# Altium PCB Microdrive_Electrode_ 4_Layers.PcbDoc
Units mm, origin at the board's own origin, x right, y up, seen from the top; angles counter-clockwise.
Board outline 29.7 x 17.4 mm, 4 copper layers (Top Layer, Mid-Layer 1, Mid-Layer 2, Bottom Layer), stack 0.492 mm thick; 50 components, 37 nets, 120 pads, 66 vias.
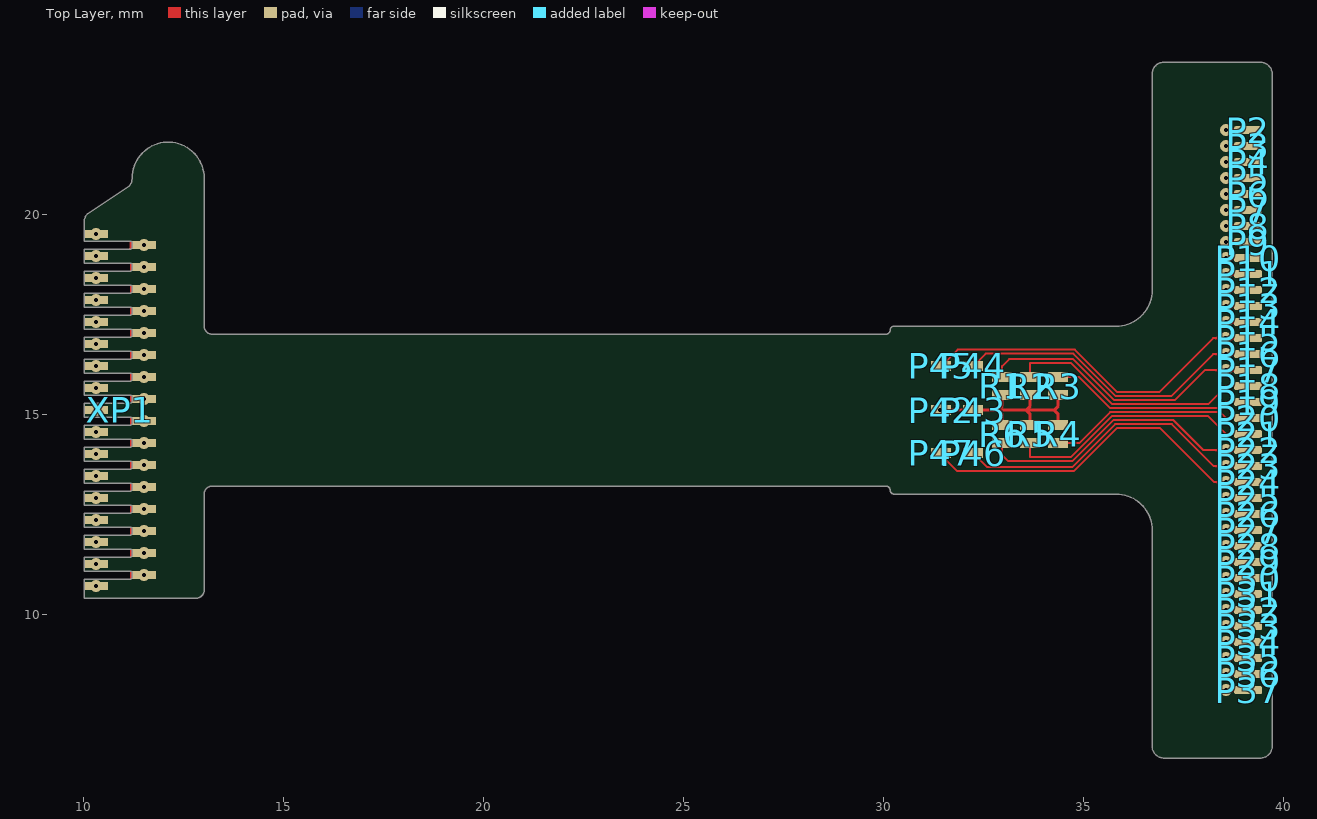
[diagram p0: Top Layer view]
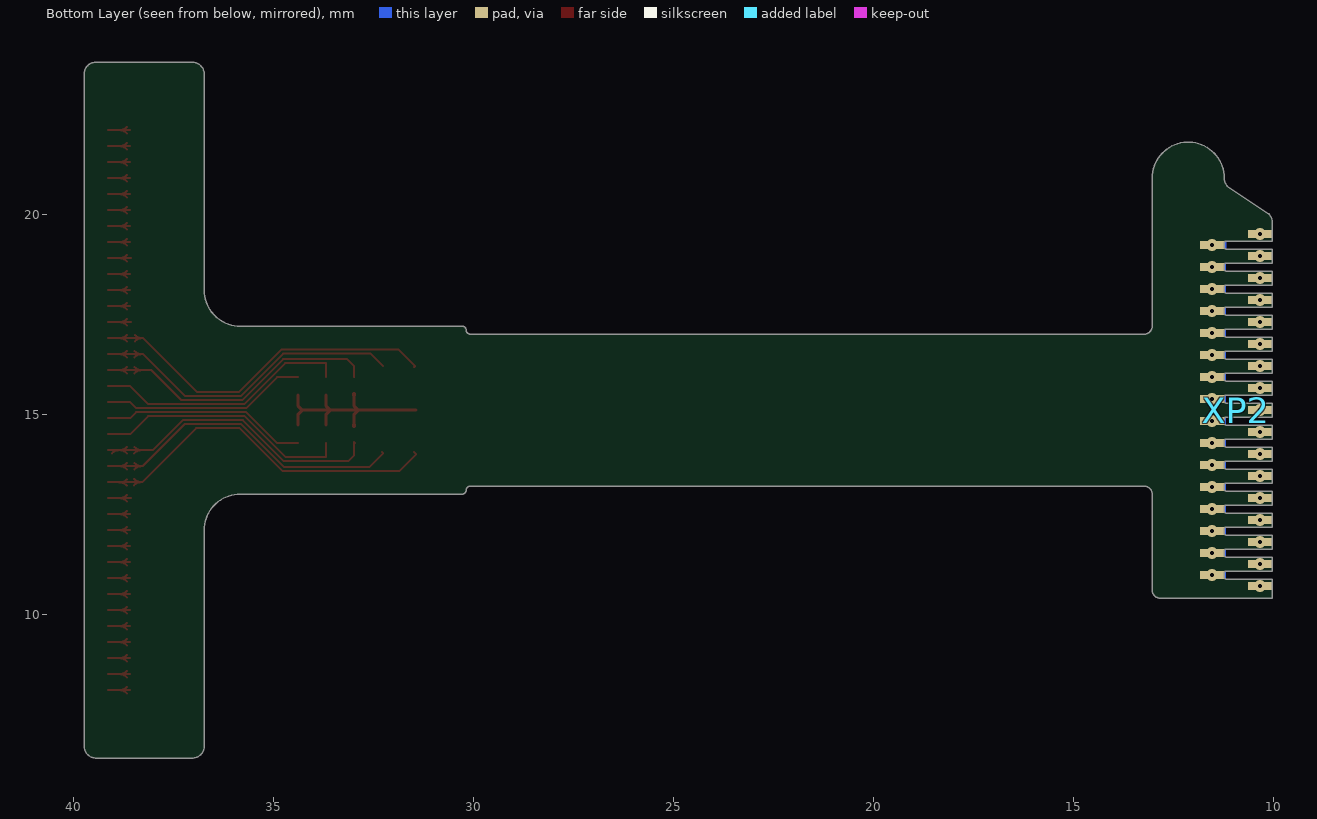
[diagram p1: Bottom Layer view, seen from below]
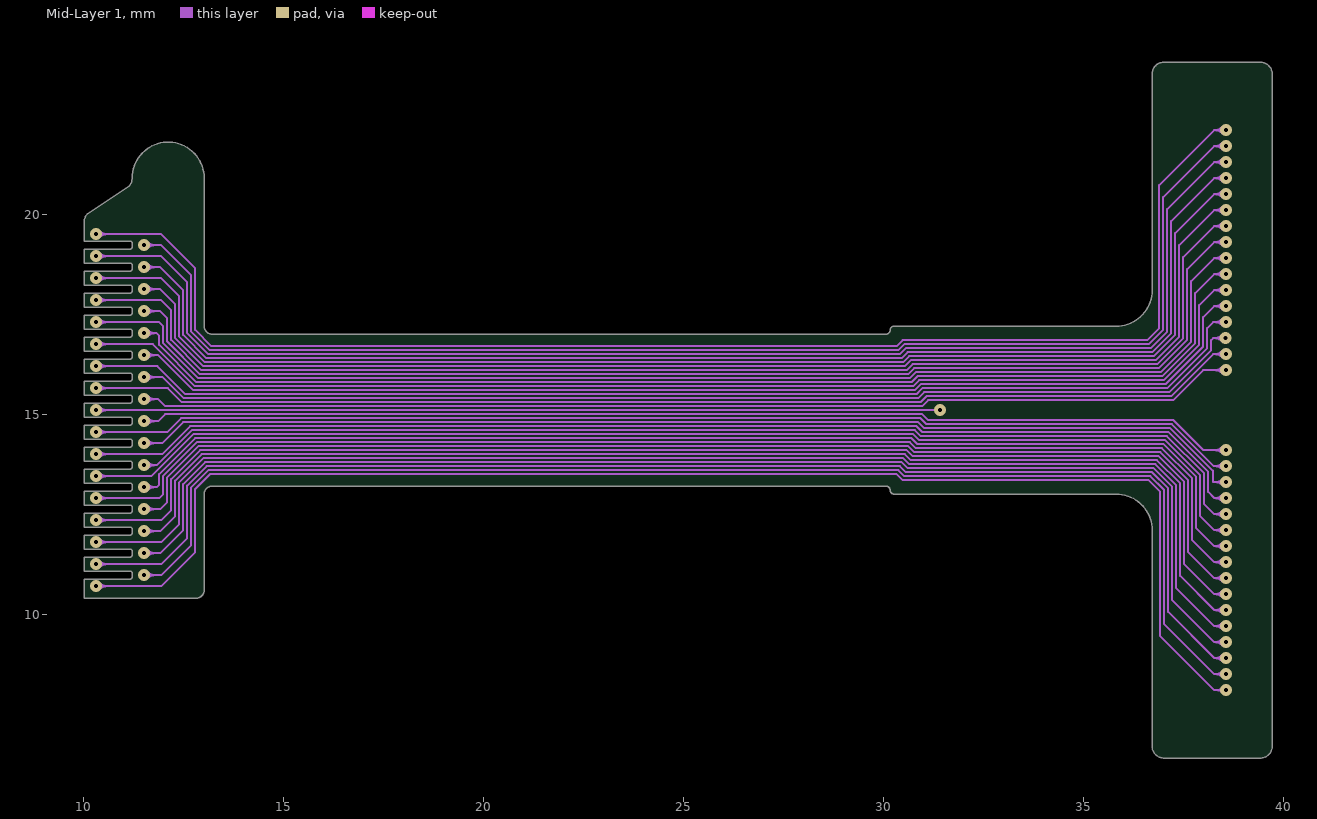
[diagram p2: Mid-Layer 1]

## Layer stack, top to bottom
Top Solder: solder mask 0.0102, Solder Resist, Dk 3.5
Top Layer: signal copper 0.0356
Dielectric1: core 0.1, FR-4, Dk 4.8
Mid-Layer 1: signal copper 0.0356
Dielectric2: prepreg 0.15, FR-4, Dk 4.8
Mid-Layer 2: signal copper 0.0356
Dielectric3: core 0.1, FR-4, Dk 4.8
Bottom Layer: signal copper 0.0356
Bottom Solder: solder mask 0.0102, Solder Resist, Dk 3.5

## Board outline
10.025,11.625 10.025,11.975 11.175,11.975 ccw(c11.175,12.025) 11.225,12.025 11.225,12.125 ccw(c11.175,12.125) 11.175,12.175 10.025,12.175 10.025,12.525 11.175,12.525 ccw(c11.175,12.575) 11.225,12.575 11.225,12.675 ccw(c11.175,12.675) 11.175,12.725 10.025,12.725 10.025,13.075 11.175,13.075 ccw(c11.175,13.125) 11.225,13.125 11.225,13.225 ccw(c11.175,13.225) 11.175,13.275 10.025,13.275 10.025,13.625 11.175,13.625 ccw(c11.175,13.675) 11.225,13.675 11.225,13.775 ccw(c11.175,13.775) 11.175,13.825 10.025,13.825 10.025,14.175 11.175,14.175 ccw(c11.175,14.225) 11.225,14.225 11.225,14.325 ccw(c11.175,14.325) 11.175,14.375 10.025,14.375 10.025,14.725 11.175,14.725 ccw(c11.175,14.775) 11.225,14.775 11.225,14.875 ccw(c11.175,14.875) 11.175,14.925 10.025,14.925 10.025,15.275 11.175,15.275 ccw(c11.175,15.325) 11.225,15.325 11.225,15.425 ccw(c11.175,15.425) 11.175,15.475 10.025,15.475 10.025,15.825 11.175,15.825 ccw(c11.175,15.875) 11.225,15.875 11.225,15.975 ccw(c11.175,15.975) 11.175,16.025 10.025,16.025 10.025,16.375 11.175,16.375 ccw(c11.175,16.425) 11.225,16.425 11.225,16.525 ccw(c11.175,16.525) 11.175,16.575 10.025,16.575 10.025,16.925 11.175,16.925 ccw(c11.175,16.975) 11.225,16.975 11.225,17.075 ccw(c11.175,17.075) 11.175,17.125 10.025,17.125 10.025,17.475 11.175,17.475 ccw(c11.175,17.525) 11.225,17.525 11.225,17.625 ccw(c11.175,17.625) 11.175,17.675 10.025,17.675 10.025,18.025 11.175,18.025 ccw(c11.175,18.075) 11.225,18.075 11.225,18.175 ccw(c11.175,18.175) 11.175,18.225 10.025,18.225 10.025,18.575 11.175,18.575 ccw(c11.175,18.625) 11.225,18.625 11.225,18.725 ccw(c11.175,18.725) 11.175,18.775 10.025,18.775 10.025,19.125 11.175,19.125 ccw(c11.175,19.175) 11.225,19.175 11.225,19.275 ccw(c11.175,19.275) 11.175,19.325 10.025,19.325 10.025,19.8 cw(c10.325,19.8) 10.113,20.012 10.1,20 11.15,20.7 11.149,20.701 ccw(c10.925,20.9) 11.225,20.9 cw(c12.125,20.9) 13.025,20.9 13.025,17.2 ccw(c13.225,17.2) 13.225,17 30.075,17 ccw(c30.075,17.1) 30.175,17.1 cw(c30.275,17.1) 30.275,17.2 35.825,17.2 ccw(c35.825,18.1) 36.725,18.1 36.725,18.101 36.725,23.5 cw(c37.026,23.499) 37.026,23.8 39.425,23.8 cw(c39.426,23.499) 39.726,23.5 39.725,23.5 39.725,6.7 39.726,6.7 cw(c39.426,6.701) 39.425,6.4 37.025,6.4 cw(c37.024,6.701) 36.724,6.7 36.725,6.7 36.725,12.1 ccw(c35.825,12.1) 35.825,13 30.275,13 cw(c30.275,13.1) 30.175,13.1 ccw(c30.075,13.1) 30.075,13.2 13.225,13.2 ccw(c13.225,13) 13.025,13 13.025,10.6 cw(c12.825,10.6) 12.825,10.4 10.025,10.4 10.025,10.875 11.175,10.875 ccw(c11.175,10.925) 11.225,10.925 11.225,11.025 ccw(c11.175,11.025) 11.175,11.075 10.025,11.075 10.025,11.425 11.175,11.425 ccw(c11.175,11.475) 11.225,11.475 11.225,11.575 ccw(c11.175,11.575) 11.175,11.625

## Design rules (kind name [scope] priority, off if disabled: settings)
Clearance Clearance_1 [InNamedPolygon('GND-m1') Or  InNamedPolygon('GND-t') Or  InNamedPolygon('VDD')Or InNamedPolygon('GND-B') vs IsPad Or IsRegion] p1: gap=0.15 ignorepadtopadclearanceinfootprint=FALSE except(0: Arc-Hole Track-Hole SMDPad-Hole THPad-Hole Via-Hole Fill-Hole Poly-Hole Region-Hole Text-Hole)
Clearance Clearance_2 [InPolygon] p2: gap=0.1 ignorepadtopadclearanceinfootprint=FALSE except(0: Arc-Hole Track-Hole SMDPad-Hole THPad-Hole Via-Hole Fill-Hole Poly-Hole Region-Hole Text-Hole)
Clearance [All] p3: gap=0.05 ignorepadtopadclearanceinfootprint=FALSE except(0: Arc-Hole Track-Hole SMDPad-Hole THPad-Hole Via-Hole Fill-Hole Poly-Hole Region-Hole Text-Hole)
HoleToHoleClearance [All] p1: gap=0.25 allowstackedmicrovias=TRUE
MinimumSolderMaskSliver [All] p1 off: minsoldermaskwidth=0.1
PolygonConnect PolygonConnect_2 [All vs InPadClass('d-c')] p1: connectstyle=Direct reliefconductorwidth=0.254 reliefentries=4 polygonreliefangle="90 Angle" airgapwidth=0.254
PolygonConnect [All vs IsVia] p2: connectstyle=Direct reliefconductorwidth=0.15 reliefentries=4 polygonreliefangle="90 Angle" airgapwidth=0.254
PolygonConnect PolygonConnect_1 [All] p3: connectstyle=Relief reliefconductorwidth=0.15 reliefentries=4 polygonreliefangle="90 Angle" airgapwidth=0.254
RoutingCorners [All] p1: cornerstyle=45-Degree minsetback=1 maxsetback=1
RoutingVias [All] p1: holewidth=0.1 width=0.35 viastyle="Through Hole" minholewidth=0.1 minwidth=0.3 maxholewidth=0.2 maxwidth=0.5
SilkToSilkClearance [All] p1 off: silktosilkclearance=0.254
SilkToSolderMaskClearance SilkscreenOverComponentPads [IsPad] p1 off: minsilkscreentomaskgap=0.254 clearancetoexposedcopper=TRUE
SolderMaskExpansion [All] p1: expansion=0.075
Width [All] p1: maxlimit=0.15 minlimit=0.05 preferedwidth=0.075
25 further rules are at their usual default settings.

## Components (designator, comment, footprint, x,y, rotation, side; value= is the part's Value field where it differs from the comment)
P2 "Pad" KP-07-02 39.125,22.1 r180 top
P3 "Pad" KP-07-02 39.125,21.7 r180 top
P4 "Pad" KP-07-02 39.125,21.3 r180 top
P5 "Pad" KP-07-02 39.125,20.9 r180 top
P6 "Pad" KP-07-02 39.125,20.5 r180 top
P7 "Pad" KP-07-02 39.125,20.1 r180 top
P8 "Pad" KP-07-02 39.125,19.7 r180 top
P9 "Pad" KP-07-02 39.125,19.3 r180 top
P10 "Pad" KP-07-02 39.125,18.9 r180 top
P11 "Pad" KP-07-02 39.125,18.5 r180 top
P12 "Pad" KP-07-02 39.125,18.1 r180 top
P13 "Pad" KP-07-02 39.125,17.7 r180 top
P14 "Pad" KP-07-02 39.125,17.3 r180 top
P15 "Pad" KP-07-02 39.125,16.9 r180 top
P16 "Pad" KP-07-02 39.125,16.5 r180 top
P17 "Pad" KP-07-02 39.125,16.1 r180 top
P18 "Pad" KP-07-02 39.125,15.7 r180 top
P19 "Pad" KP-07-02 39.125,15.3 r180 top
P20 "Pad" KP-07-02 39.125,14.9 r180 top
P21 "Pad" KP-07-02 39.125,14.5 r180 top
P22 "Pad" KP-07-02 39.125,14.1 r180 top
P23 "Pad" KP-07-02 39.125,13.7 r180 top
P24 "Pad" KP-07-02 39.125,13.3 r180 top
P25 "Pad" KP-07-02 39.125,12.9 r180 top
P26 "Pad" KP-07-02 39.125,12.5 r180 top
P27 "Pad" KP-07-02 39.125,12.1 r180 top
P28 "Pad" KP-07-02 39.125,11.7 r180 top
P29 "Pad" KP-07-02 39.125,11.3 r180 top
P30 "Pad" KP-07-02 39.125,10.9 r180 top
P31 "Pad" KP-07-02 39.125,10.5 r180 top
P32 "Pad" KP-07-02 39.125,10.1 r180 top
P33 "Pad" KP-07-02 39.125,9.7 r180 top
P34 "Pad" KP-07-02 39.125,9.3 r180 top
P35 "Pad" KP-07-02 39.125,8.9 r180 top
P36 "Pad" KP-07-02 39.125,8.5 r180 top
P37 "Pad" KP-07-02 39.125,8.1 r180 top
P42 "KP-05025" KP-05-025 31.45,15.1 r180 top
P43 "KP-05025" KP-05-025 32.25,15.1 r180 top
P44 "KP-05025" KP-05-025 32.25,16.2 r180 top
P45 "KP-05025" KP-05-025 31.45,16.2 r0 top
P46 "KP-05025" KP-05-025 32.25,14.025 r180 top
P47 "KP-05025" KP-05-025 31.45,14.025 r180 top
R1 "0" "RESC widecustom" 32.975,15.7 r90 top
R2 "0" "RESC widecustom" 33.675,15.7 r90 top
R3 "0" "RESC widecustom" 34.375,15.7 r90 top
R4 "0" "RESC widecustom" 34.375,14.5 r270 top
R5 "0" "RESC widecustom" 33.675,14.5 r270 top
R6 "0" "RESC widecustom" 32.975,14.5 r270 top
XP1 "Solder Inteface 33 pads" "Solder Inteface 33 pads ver 3"#1 10.925,15.1 r270 top
XP2 "Solder Inteface 33 pads" "Solder Inteface 33 pads ver 3"#2 10.925,15.1 r270 bottom (schematic designator XP1)

## Footprints (in the part's own frame and the unit in brackets; to place one, negate y for a bottom-side part, rotate by r counter-clockwise, add the part's x,y. Pads: shape width x height; smd on the part's side, far side on the other; paste and mask are expansions set on the pad)
KP-05-025 [mm]
  rect 0.5x0.25 smd mask+0.05: 1(0,0)
KP-07-02 [mm]
  rrect50% 0.7x0.2 smd mask+0.05: 1(0,0)
"RESC widecustom" [mm]
  rect 0.25x0.5 smd mask+0.05: 1(-0.225,0) 2(0.225,0)
  body extent -0.31,-0.17 0.32,0.17, height 0.26
"Solder Inteface 33 pads ver 3"#1 [mm] "Solder Inteface 33 pads pad 0.2 space 0.35"
  rect 0.2x0.6 smd mask+0.05: 1(-4.4,-0.6) 2(-4.125,0.6) 3(-3.85,-0.6) 4(-3.575,0.6) 5(-3.3,-0.6) 6(-3.025,0.6) 7(-2.75,-0.6) 8(-2.475,0.6) 9(-2.2,-0.6) 10(-1.925,0.6) 11(-1.65,-0.6) 12(-1.375,0.6) 13(-1.1,-0.6) 14(-0.825,0.6) 15(-0.55,-0.6) 16(-0.275,0.6) 17(0,-0.6) 18(0.275,0.6) 19(0.55,-0.6) 20(0.825,0.6) 21(1.1,-0.6) 22(1.375,0.6) 23(1.65,-0.6) 24(1.925,0.6) 25(2.2,-0.6) 26(2.475,0.6) 27(2.75,-0.6) 28(3.025,0.6) 29(3.3,-0.6) 30(3.575,0.6) 31(3.85,-0.6) 32(4.125,0.6) 33(4.4,-0.6)
"Solder Inteface 33 pads ver 3"#2 [mm] "Solder Inteface 33 pads pad 0.2 space 0.35"
  rect 0.2x0.6 smd mask+0.05: 1(-4.4,0.6) 2(-4.125,-0.6) 3(-3.85,0.6) 4(-3.575,-0.6) 5(-3.3,0.6) 6(-3.025,-0.6) 7(-2.75,0.6) 8(-2.475,-0.6) 9(-2.2,0.6) 10(-1.925,-0.6) 11(-1.65,0.6) 12(-1.375,-0.6) 13(-1.1,0.6) 14(-0.825,-0.6) 15(-0.55,0.6) 16(-0.275,-0.6) 17(0,0.6) 18(0.275,-0.6) 19(0.55,0.6) 20(0.825,-0.6) 21(1.1,0.6) 22(1.375,-0.6) 23(1.65,0.6) 24(1.925,-0.6) 25(2.2,0.6) 26(2.475,-0.6) 27(2.75,0.6) 28(3.025,-0.6) 29(3.3,0.6) 30(3.575,-0.6) 31(3.85,0.6) 32(4.125,-0.6) 33(4.4,0.6)

## Part data
R1 R2 R3 R4 R5 R6: library part Res-SMD-0, "Resistor"

## Via types
v1: diameter 0.3, hole 0.1, Top Layer to Bottom Layer, 33 vias
v2: diameter 0.3, hole 0.1, Top Layer to Mid-Layer 1, 33 vias

## Nets (pads, with @x,y where several pads share a name; then routed paths per layer and width w, separated by ;. In a path a pad name is that pad's centre, name@x,y a point inside that pad or via, vN(x,y) a via of type N, cw(c..) or ccw(c..) an arc to the next point about the centre after c; other vN are vias at no path point)
1: P9.1 XP1.8 XP2.8 | length 32.3
  Top Layer w0.05: v2(38.575,19.3) P9.1 ; v2@38.658,19.22 cw(c38.85,19.028) 38.85,19.3 cw(c38.85,19.572) v2@38.658,19.38
  Mid-Layer 1 w0.05: v1(11.525,17.575) 11.925,17.575 12.1,17.4 12.1,16.816 12.916,16 30.625,16 ; v1@11.616,17.495 cw(c11.808,17.303) 11.808,17.575 cw(c11.808,17.847) v1@11.616,17.655 ; 30.626,16 30.776,16.15 36.894,16.15 37.6,16.856 37.6,18.625 38.275,19.3 v2(38.575,19.3) ; v2@38.476,19.22 ccw(c38.284,19.028) 38.284,19.3 ccw(c38.284,19.572) v2@38.476,19.38
2: P8.1 XP1.7 XP2.7 | length 33.9
  Top Layer w0.05: v2(38.575,19.7) P8.1 ; v2@38.658,19.62 cw(c38.85,19.428) 38.85,19.7 cw(c38.85,19.972) v2@38.658,19.78
  Mid-Layer 1 w0.05: v1(10.325,17.85) 11.95,17.85 12.2,17.6 12.2,16.857 12.957,16.1 30.581,16.1 ; v1@10.408,17.77 cw(c10.6,17.578) 10.6,17.85 cw(c10.6,18.122) v1@10.408,17.93 ; 30.585,16.1 30.735,16.25 36.852,16.25 37.5,16.898 37.5,18.925 38.275,19.7 v2(38.575,19.7) ; v2@38.476,19.62 ccw(c38.284,19.428) 38.284,19.7 ccw(c38.284,19.972) v2@38.476,19.78
3: P7.1 XP1.6 XP2.6 | length 33.1
  Top Layer w0.05: v2(38.575,20.1) P7.1 ; v2@38.658,20.02 cw(c38.85,19.828) 38.85,20.1 cw(c38.85,20.372) v2@38.658,20.18
  Mid-Layer 1 w0.05: v1(11.525,18.125) 11.925,18.125 12.3,17.75 12.3,16.899 12.999,16.2 30.539,16.2 ; v1@11.616,18.045 cw(c11.808,17.853) 11.808,18.125 cw(c11.808,18.397) v1@11.616,18.205 ; 30.544,16.2 30.694,16.35 36.811,16.35 37.4,16.939 37.4,19.225 38.275,20.1 v2(38.575,20.1) ; v2@38.476,20.02 ccw(c38.284,19.828) 38.284,20.1 ccw(c38.284,20.372) v2@38.476,20.18
4: P6.1 XP1.5 XP2.5 | length 34.8
  Top Layer w0.05: v2(38.575,20.5) P6.1 ; v2@38.658,20.42 cw(c38.85,20.228) 38.85,20.5 cw(c38.85,20.772) v2@38.658,20.58
  Mid-Layer 1 w0.05: v1(10.325,18.4) 11.95,18.4 12.4,17.95 12.4,16.94 13.04,16.3 30.5,16.3 ; v1@10.408,18.32 cw(c10.6,18.128) 10.6,18.4 cw(c10.6,18.672) v1@10.408,18.48 ; 30.502,16.3 30.652,16.45 36.769,16.45 37.3,16.981 37.3,19.525 38.275,20.5 v2(38.575,20.5) ; v2@38.476,20.42 ccw(c38.284,20.228) 38.284,20.5 ccw(c38.284,20.772) v2@38.476,20.58
5: P5.1 XP1.4 XP2.4 | length 34
  Top Layer w0.05: v2(38.575,20.9) P5.1 ; v2@38.658,20.82 cw(c38.85,20.628) 38.85,20.9 cw(c38.85,21.172) v2@38.658,20.98
  Mid-Layer 1 w0.05: v1(11.525,18.675) 11.925,18.675 12.5,18.1 12.5,16.981 13.081,16.4 30.461,16.4 30.611,16.55 36.728,16.55 37.2,17.022 37.2,19.825 38.275,20.9 v2(38.575,20.9) ; v1@11.616,18.595 cw(c11.808,18.403) 11.808,18.675 cw(c11.808,18.947) v1@11.616,18.755 ; v2@38.476,20.82 ccw(c38.284,20.628) 38.284,20.9 ccw(c38.284,21.172) v2@38.476,20.98
6: P4.1 XP1.3 XP2.3 | length 35.6
  Top Layer w0.05: v2(38.575,21.3) P4.1 ; v2@38.658,21.22 cw(c38.85,21.028) 38.85,21.3 cw(c38.85,21.572) v2@38.658,21.38
  Mid-Layer 1 w0.05: v1(10.325,18.95) 11.95,18.95 12.6,18.3 12.6,17.023 13.123,16.5 30.419,16.5 30.569,16.65 36.687,16.65 37.1,17.063 37.1,20.125 38.275,21.3 v2(38.575,21.3) ; v1@10.408,18.87 cw(c10.6,18.678) 10.6,18.95 cw(c10.6,19.222) v1@10.408,19.03 ; v2@38.476,21.22 ccw(c38.284,21.028) 38.284,21.3 ccw(c38.284,21.572) v2@38.476,21.38
7: P3.1 XP1.2 XP2.2 | length 34.8
  Top Layer w0.05: v2(38.575,21.7) P3.1 ; v2@38.658,21.62 cw(c38.85,21.428) 38.85,21.7 cw(c38.85,21.972) v2@38.658,21.78
  Mid-Layer 1 w0.05: v1(11.525,19.225) 11.95,19.225 12.7,18.475 12.7,17.064 13.164,16.6 30.375,16.6 ; v1@11.608,19.145 cw(c11.8,18.953) 11.8,19.225 cw(c11.8,19.497) v1@11.608,19.305 ; 30.378,16.6 30.528,16.75 36.645,16.75 37,17.105 37,20.425 38.275,21.7 v2(38.575,21.7) ; v2@38.476,21.62 ccw(c38.284,21.428) 38.284,21.7 ccw(c38.284,21.972) v2@38.476,21.78
8: P2.1 XP1.1 XP2.1 | length 36.5
  Top Layer w0.05: v2(38.575,22.1) P2.1 ; v2@38.658,22.02 cw(c38.85,21.828) 38.85,22.1 cw(c38.85,22.372) v2@38.658,22.18
  Mid-Layer 1 w0.05: v1(10.325,19.5) 11.95,19.5 12.8,18.65 12.8,17.106 13.206,16.7 30.337,16.7 30.487,16.85 36.604,16.85 36.9,17.146 36.9,20.724 38.276,22.1 v2(38.575,22.1) ; v1@10.408,19.42 cw(c10.6,19.228) 10.6,19.5 cw(c10.6,19.772) v1@10.408,19.58 ; v2@38.476,22.02 ccw(c38.284,21.828) 38.284,22.1 ccw(c38.284,22.372) v2@38.476,22.18
9: P37.1 XP1.33 XP2.33 | length 36.5
  Top Layer w0.05: v2(38.575,8.1) P37.1 ; v2@38.658,8.02 cw(c38.85,7.828) 38.85,8.1 cw(c38.85,8.372) v2@38.658,8.18
  Mid-Layer 1 w0.05: v1(10.325,10.7) 11.95,10.7 12.8,11.55 12.8,13.128 13.172,13.5 30.337,13.5 30.487,13.35 36.638,13.35 36.926,13.062 36.926,9.45 38.276,8.1 v2(38.575,8.1) ; v1@10.408,10.62 cw(c10.6,10.428) 10.6,10.7 cw(c10.6,10.972) v1@10.408,10.78 ; v2@38.517,8.02 ccw(c38.325,7.828) 38.325,8.1 ccw(c38.325,8.372) v2@38.517,8.18
10: P36.1 XP1.32 XP2.32 | length 34.9
  Top Layer w0.05: v2(38.575,8.5) P36.1 ; v2@38.658,8.42 cw(c38.85,8.228) 38.85,8.5 cw(c38.85,8.772) v2@38.658,8.58
  Mid-Layer 1 w0.05: v1(11.525,10.975) 11.95,10.975 12.7,11.725 12.7,13.169 13.131,13.6 30.375,13.6 ; v1@11.608,10.895 cw(c11.8,10.703) 11.8,10.975 cw(c11.8,11.247) v1@11.608,11.055 ; 30.378,13.6 30.528,13.45 36.679,13.45 37.026,13.103 37.026,9.75 38.276,8.5 v2(38.575,8.5) ; v2@38.492,8.42 ccw(c38.3,8.228) 38.3,8.5 ccw(c38.3,8.772) v2@38.492,8.58
11: P35.1 XP1.31 XP2.31 | length 35.7
  Top Layer w0.05: v2(38.575,8.9) P35.1 ; v2@38.658,8.82 cw(c38.85,8.628) 38.85,8.9 cw(c38.85,9.172) v2@38.658,8.98
  Mid-Layer 1 w0.05: v1(10.325,11.25) 11.95,11.25 12.6,11.9 12.6,13.211 13.089,13.7 30.419,13.7 30.569,13.55 36.721,13.55 37.126,13.144 37.126,10.057 38.284,8.9 v2(38.575,8.9) ; v1@10.408,11.17 cw(c10.6,10.978) 10.6,11.25 cw(c10.6,11.522) v1@10.408,11.33 ; v2@38.478,8.82 ccw(c38.286,8.628) 38.286,8.9 ccw(c38.286,9.172) v2@38.478,8.98
12: P34.1 XP1.30 XP2.30 | length 34
  Top Layer w0.05: v2(38.575,9.3) P34.1 ; v2@38.658,9.22 cw(c38.85,9.028) 38.85,9.3 cw(c38.85,9.572) v2@38.658,9.38
  Mid-Layer 1 w0.05: v1(11.525,11.525) 11.925,11.525 12.5,12.1 12.5,13.252 13.048,13.8 30.45,13.8 ; v1@11.608,11.445 cw(c11.8,11.253) 11.8,11.525 cw(c11.8,11.797) v1@11.608,11.605 ; 30.461,13.8 30.611,13.65 36.762,13.65 37.226,13.186 37.226,10.349 38.275,9.3 v2(38.575,9.3) ; v2@38.476,9.22 ccw(c38.284,9.028) 38.284,9.3 ccw(c38.284,9.572) v2@38.476,9.38
13: P33.1 XP1.29 XP2.29 | length 34.8
  Top Layer w0.05: v2(38.575,9.7) P33.1 ; v2@38.658,9.62 cw(c38.85,9.428) 38.85,9.7 cw(c38.85,9.972) v2@38.658,9.78
  Mid-Layer 1 w0.05: v1(10.325,11.8) 11.95,11.8 12.4,12.25 12.4,13.294 13.006,13.9 30.5,13.9 ; v1@10.408,11.72 cw(c10.6,11.528) 10.6,11.8 cw(c10.6,12.072) v1@10.408,11.88 ; 30.502,13.9 30.652,13.75 36.804,13.75 37.326,13.227 37.326,10.649 38.275,9.7 v2(38.575,9.7) ; v2@38.478,9.62 ccw(c38.286,9.428) 38.286,9.7 ccw(c38.286,9.972) v2@38.478,9.78
14: P32.1 XP1.28 XP2.28 | length 33.2
  Top Layer w0.05: v2(38.575,10.1) P32.1 ; v2@38.658,10.02 cw(c38.85,9.828) 38.85,10.1 cw(c38.85,10.372) v2@38.658,10.18
  Mid-Layer 1 w0.05: v1(11.525,12.075) 11.925,12.075 12.3,12.45 12.3,13.335 12.965,14 30.539,14 ; v1@11.608,11.995 cw(c11.8,11.803) 11.8,12.075 cw(c11.8,12.347) v1@11.608,12.155 ; 30.544,14 30.694,13.85 36.845,13.85 37.426,13.269 37.426,10.957 38.284,10.1 ; v2@38.476,10.02 ccw(c38.284,9.828) 38.284,10.1 ; v2@38.476,10.18 cw(c38.284,10.372) 38.284,10.1 ; v2(38.575,10.1) 38.284,10.1
15: P31.1 XP1.27 XP2.27 | length 34
  Top Layer w0.05: v2(38.575,10.5) P31.1 ; v2@38.658,10.42 cw(c38.85,10.228) 38.85,10.5 cw(c38.85,10.772) v2@38.658,10.58
  Mid-Layer 1 w0.05: v1(10.325,12.35) 11.95,12.35 12.2,12.6 12.2,13.376 12.924,14.1 30.581,14.1 ; v1@10.408,12.27 cw(c10.6,12.078) 10.6,12.35 cw(c10.6,12.622) v1@10.408,12.43 ; 30.585,14.1 30.735,13.95 36.887,13.95 37.526,13.31 37.526,11.249 38.275,10.5 v2(38.575,10.5) ; v2@38.478,10.42 ccw(c38.286,10.228) 38.286,10.5 ccw(c38.286,10.772) v2@38.478,10.58
16: P30.1 XP1.26 XP2.26 | length 32.3
  Top Layer w0.05: v2(38.575,10.9) P30.1 ; v2@38.658,10.82 cw(c38.85,10.628) 38.85,10.9 cw(c38.85,11.172) v2@38.658,10.98
  Mid-Layer 1 w0.05: v1(11.525,12.625) 11.925,12.625 12.1,12.8 12.1,13.418 12.882,14.2 30.625,14.2 ; v1@11.608,12.545 cw(c11.8,12.353) 11.8,12.625 cw(c11.8,12.897) v1@11.608,12.705 ; 30.626,14.2 30.776,14.05 36.928,14.05 37.626,13.351 37.626,11.55 38.276,10.9 v2(38.575,10.9) ; v2@38.476,10.82 ccw(c38.284,10.628) 38.284,10.9 ccw(c38.284,11.172) v2@38.476,10.98
17: P29.1 XP1.25 XP2.25 | length 33.1
  Top Layer w0.05: v2(38.575,11.3) P29.1 ; v2@38.658,11.22 cw(c38.85,11.028) 38.85,11.3 cw(c38.85,11.572) v2@38.658,11.38
  Mid-Layer 1 w0.05: v1(10.325,12.9) 11.9,12.9 12,13 12,13.459 12.841,14.3 30.657,14.3 ; v1@10.408,12.82 cw(c10.6,12.628) 10.6,12.9 cw(c10.6,13.172) v1@10.408,12.98 ; 30.668,14.3 30.818,14.15 36.969,14.15 37.726,13.393 37.726,11.849 38.275,11.3 v2(38.575,11.3) ; v2@38.476,11.22 ccw(c38.284,11.028) 38.284,11.3 ccw(c38.284,11.572) v2@38.476,11.38
18: P28.1 XP1.24 XP2.24 | length 31.4
  Top Layer w0.05: v2(38.575,11.7) P28.1 ; v2@38.658,11.62 cw(c38.85,11.428) 38.85,11.7 cw(c38.85,11.972) v2@38.658,11.78
  Mid-Layer 1 w0.05: v1(11.525,13.175) 11.835,13.175 11.9,13.24 11.9,13.501 12.799,14.4 30.702,14.4 ; v1@11.608,13.095 cw(c11.8,12.903) 11.8,13.175 cw(c11.8,13.447) v1@11.608,13.255 ; 30.709,14.4 30.859,14.25 37.011,14.25 37.826,13.434 37.826,12.149 38.275,11.7 v2(38.575,11.7) ; v2@38.476,11.62 ccw(c38.284,11.428) 38.284,11.7 ccw(c38.284,11.972) v2@38.476,11.78
19: P27.1 XP1.23 XP2.23 | length 32.1
  Top Layer w0.05: v2(38.575,12.1) P27.1 ; v2@38.658,12.02 cw(c38.85,11.828) 38.85,12.1 cw(c38.85,12.372) v2@38.658,12.18
  Mid-Layer 1 w0.05: v1(10.325,13.45) 11.708,13.45 12.758,14.5 30.75,14.5 30.901,14.35 37.052,14.35 37.926,13.476 37.926,12.449 38.275,12.1 v2(38.575,12.1) ; v1@10.408,13.37 cw(c10.6,13.178) 10.6,13.45 cw(c10.6,13.722) v1@10.408,13.53 ; v2@38.478,12.02 ccw(c38.286,11.828) 38.286,12.1 ccw(c38.286,12.372) v2@38.478,12.18
20: P26.1 XP1.22 XP2.22 | length 30.6
  Top Layer w0.05: v2(38.575,12.5) P26.1 ; v2@38.658,12.42 cw(c38.85,12.228) 38.85,12.5 cw(c38.85,12.772) v2@38.658,12.58
  Mid-Layer 1 w0.05: v1(11.525,13.725) 11.841,13.725 12.716,14.6 30.792,14.6 30.942,14.45 37.094,14.45 38.026,13.517 38.026,12.749 38.275,12.5 v2(38.575,12.5) ; v1@11.616,13.645 cw(c11.808,13.453) 11.808,13.725 cw(c11.808,13.997) v1@11.616,13.805 ; v2@38.478,12.42 ccw(c38.286,12.228) 38.286,12.5 ccw(c38.286,12.772) v2@38.478,12.58
21: P25.1 XP1.21 XP2.21 | length 31.4
  Top Layer w0.05: v2@38.56,12.9 P25.1 ; v2@38.658,12.82 cw(c38.85,12.628) 38.85,12.9 cw(c38.85,13.172) v2@38.658,12.98
  Mid-Layer 1 w0.05: v1(10.325,14) 11.975,14 12.675,14.7 30.825,14.7 ; v1@10.408,13.92 cw(c10.6,13.728) 10.6,14 cw(c10.6,14.272) v1@10.408,14.08 ; 30.834,14.7 30.984,14.55 37.135,14.55 38.126,13.559 38.126,13.057 38.284,12.9 ; v2@38.476,12.82 ccw(c38.284,12.628) 38.284,12.9 ; v2@38.476,12.98 cw(c38.284,13.172) 38.284,12.9 ; v2(38.575,12.9) 38.284,12.9
22: P24.1 P47.1 XP1.20 XP2.20 | length 38.7
  Top Layer w0.05: P47.1@31.425,14 31.85,13.575 34.766,13.575 35.841,14.65 36.926,14.65 38.276,13.3 P24.1 ; P47.1 P47.1@31.475,14.05 ; 38.285,13.3 ccw(c38.285,13.572) v2@38.477,13.38 ; 38.293,13.3 cw(c38.293,13.028) v2@38.485,13.22 ; v2@38.658,13.212 cw(c38.85,13.02) 38.85,13.291 cw(c38.85,13.563) v2@38.658,13.371
  Mid-Layer 1 w0.05: v1(11.525,14.275) 11.975,14.275 12.5,14.8 30.875,14.8 31.025,14.65 37.176,14.65 38.241,13.585 38.241,13.3 v2(38.575,13.3) 38.61,13.3 v2@38.619,13.291 ; v1@11.608,14.195 cw(c11.8,14.003) 11.8,14.275 cw(c11.8,14.547) v1@11.608,14.355 ; v2@38.492,13.22 ccw(c38.3,13.028) 38.3,13.3 ccw(c38.3,13.572) v2@38.492,13.38
23: P23.1 P46.1 XP1.19 XP2.19 | length 38.5
  Top Layer w0.05: P46.1@32.275,14.05 P46.1 32.6,13.675 34.724,13.675 35.799,14.75 37.218,14.75 38.268,13.7 v2(38.575,13.7) P23.1 ; v2@38.472,13.62 ccw(c38.28,13.428) 38.28,13.7 ccw(c38.28,13.972) v2@38.472,13.78 ; v2@38.658,13.62 cw(c38.85,13.428) 38.85,13.7 cw(c38.85,13.972) v2@38.658,13.78
  Mid-Layer 1 w0.05: v1(10.325,14.55) 12.1,14.55 12.45,14.9 30.925,14.9 ; v1@10.408,14.47 cw(c10.6,14.278) 10.6,14.55 cw(c10.6,14.822) v1@10.408,14.63 ; 30.934,14.9 31.084,14.75 37.218,14.75 38.268,13.7 v2(38.575,13.7) ; v2@38.478,13.62 ccw(c38.286,13.428) 38.286,13.7 ccw(c38.286,13.972) v2@38.478,13.78
24: P22.1 R6.2 XP1.18 XP2.18 | length 36.7
  Top Layer w0.05: R6.2@32.95,14.275 R6.2@32.975,14.3 ; R6.2 32.975,13.975 33.125,13.825 34.733,13.825 35.758,14.85 37.259,14.85 38.009,14.1 v2(38.575,14.1) P22.1 ; 38.28,14.1 ccw(c38.28,14.372) v2@38.472,14.18 ; 38.285,14.1 cw(c38.285,13.828) v2@38.477,14.02 ; v2@38.658,14.02 cw(c38.85,13.828) 38.85,14.1 cw(c38.85,14.372) v2@38.658,14.18 ; P22.1@38.843,14.1 cw(c38.843,13.828) P22.1@39.035,14.02
  Mid-Layer 1 w0.05: v1(11.525,14.825) 11.875,14.825 12.05,15 30.975,15 31.125,14.85 37.259,14.85 38.009,14.1 v2(38.575,14.1) ; v1@11.616,14.745 cw(c11.808,14.553) 11.808,14.825 cw(c11.808,15.097) v1@11.616,14.905 ; v2@38.476,14.02 ccw(c38.284,13.828) 38.284,14.1 ccw(c38.284,14.372) v2@38.476,14.18
25: P17.1 R1.2 XP1.16 XP2.16 | length 36.4
  Top Layer w0.05: R1.2 32.975,16.2 33.15,16.375 34.75,16.375 35.775,15.35 37.293,15.35 38.043,16.1 v2(38.575,16.1) P17.1 ; v2@38.472,16.02 ccw(c38.28,15.828) 38.28,16.1 ccw(c38.28,16.372) v2@38.472,16.18 ; v2@38.658,16.02 cw(c38.85,15.828) 38.85,16.1 cw(c38.85,16.372) v2@38.658,16.18
  Mid-Layer 1 w0.05: v1(11.525,15.375) 11.875,15.375 12.05,15.2 30.975,15.2 31.125,15.35 37.25,15.35 38,16.1 v2(38.575,16.1) ; v1@11.616,15.295 cw(c11.808,15.103) 11.808,15.375 cw(c11.808,15.647) v1@11.616,15.455 ; v2@38.476,16.02 ccw(c38.284,15.828) 38.284,16.1 ccw(c38.284,16.372) v2@38.476,16.18
26: P16.1 P44.1 XP1.15 XP2.15 | length 38.5
  Top Layer w0.05: P44.1 32.562,16.513 34.754,16.513 35.816,15.45 37.2,15.45 38.25,16.5 v2(38.575,16.5) P16.1 ; v2@38.472,16.42 ccw(c38.28,16.228) 38.28,16.5 ccw(c38.28,16.772) v2@38.472,16.58 ; v2@38.658,16.42 cw(c38.85,16.228) 38.85,16.5 cw(c38.85,16.772) v2@38.658,16.58
  Mid-Layer 1 w0.05: v1(10.325,15.65) 12.12,15.65 12.47,15.3 30.925,15.3 ; v1@10.408,15.57 cw(c10.6,15.378) 10.6,15.65 cw(c10.6,15.922) v1@10.408,15.73 ; 30.934,15.3 31.084,15.45 37.2,15.45 38.25,16.5 v2(38.575,16.5) ; v2@38.476,16.42 ccw(c38.284,16.228) 38.284,16.5 ccw(c38.284,16.772) v2@38.476,16.58
27: P15.1 P45.1 XP1.14 XP2.14 | length 38.6
  Top Layer w0.05: P45.1@31.475,16.175 P45.1 31.862,16.613 34.795,16.613 35.858,15.55 36.9,15.55 38.25,16.9 v2(38.56,16.9) P15.1 ; v2@38.461,16.82 ccw(c38.269,16.628) 38.269,16.9 ccw(c38.269,17.172) v2@38.461,16.98 ; v2@38.658,16.82 cw(c38.85,16.628) 38.85,16.9 cw(c38.85,17.172) v2@38.658,16.98
  Mid-Layer 1 w0.05: v1(11.525,15.925) 11.987,15.925 12.512,15.4 30.875,15.4 31.025,15.55 37.151,15.55 38.2,16.599 38.2,16.85 38.25,16.9 v2(38.56,16.9) ; v1@11.616,15.845 cw(c11.808,15.653) 11.808,15.925 cw(c11.808,16.197) v1@11.616,16.005 ; v2@38.467,16.82 ccw(c38.275,16.628) 38.275,16.9 ccw(c38.275,17.172) v2@38.467,16.98
28: P14.1 XP1.13 XP2.13 | length 31.4
  Top Layer w0.05: v2@38.56,17.3 P14.1 ; v2@38.658,17.22 cw(c38.85,17.028) 38.85,17.3 cw(c38.85,17.572) v2@38.658,17.38
  Mid-Layer 1 w0.05: v1(10.325,16.2) 11.853,16.2 12.553,15.5 30.825,15.5 ; v1@10.408,16.12 cw(c10.6,15.928) 10.6,16.2 cw(c10.6,16.472) v1@10.408,16.28 ; 30.834,15.5 30.951,15.617 30.984,15.65 37.101,15.65 38.1,16.649 38.1,17.15 38.25,17.3 v2(38.575,17.3) ; v2@38.476,17.22 ccw(c38.284,17.028) 38.284,17.3 ccw(c38.284,17.572) v2@38.476,17.38
29: P13.1 XP1.12 XP2.12 | length 30.5
  Top Layer w0.05: v2(38.575,17.7) P13.1 ; v2@38.658,17.62 cw(c38.85,17.428) 38.85,17.7 cw(c38.85,17.972) v2@38.658,17.78
  Mid-Layer 1 w0.05: v1(11.525,16.475) 11.875,16.475 12.75,15.6 30.792,15.6 30.851,15.659 30.942,15.75 37.059,15.75 38,16.691 38,17.425 38.275,17.7 v2(38.575,17.7) ; v1@11.616,16.395 cw(c11.808,16.203) 11.808,16.475 cw(c11.808,16.747) v1@11.616,16.555 ; v2@38.476,17.62 ccw(c38.284,17.428) 38.284,17.7 ccw(c38.284,17.972) v2@38.476,17.78
30: P12.1 XP1.11 XP2.11 | length 32.1
  Top Layer w0.05: v2(38.575,18.1) P12.1 ; v2@38.658,18.02 cw(c38.85,17.828) 38.85,18.1 cw(c38.85,18.372) v2@38.658,18.18
  Mid-Layer 1 w0.05: v1(10.325,16.75) 11.741,16.75 12.791,15.7 30.751,15.7 30.901,15.85 37.018,15.85 37.9,16.732 37.9,17.725 38.275,18.1 v2(38.575,18.1) ; v1@10.408,16.67 cw(c10.6,16.478) 10.6,16.75 cw(c10.6,17.022) v1@10.408,16.83 ; v2@38.476,18.02 ccw(c38.284,17.828) 38.284,18.1 ccw(c38.284,18.372) v2@38.476,18.18
31: P11.1 XP1.10 XP2.10 | length 31.4
  Top Layer w0.05: v2(38.575,18.5) P11.1 ; v2@38.658,18.42 cw(c38.85,18.228) 38.85,18.5 cw(c38.85,18.772) v2@38.658,18.58
  Mid-Layer 1 w0.05: v1(11.525,17.025) 11.835,17.025 11.9,16.96 11.9,16.733 12.833,15.8 30.702,15.8 ; v1@11.616,16.945 cw(c11.808,16.753) 11.808,17.025 cw(c11.808,17.297) v1@11.616,17.105 ; 30.709,15.8 30.859,15.95 36.976,15.95 37.8,16.774 37.8,18.025 38.275,18.5 v2(38.575,18.5) ; v2@38.476,18.42 ccw(c38.284,18.228) 38.284,18.5 ccw(c38.284,18.772) v2@38.476,18.58
32: P10.1 XP1.9 XP2.9 | length 33.1
  Top Layer w0.05: v2@38.56,18.9 P10.1 ; v2@38.658,18.82 cw(c38.85,18.628) 38.85,18.9 cw(c38.85,19.172) v2@38.658,18.98
  Mid-Layer 1 w0.05: v1(10.325,17.3) 11.9,17.3 12,17.2 12,16.774 12.874,15.9 30.668,15.9 30.818,16.05 36.935,16.05 37.7,16.815 37.7,18.325 38.275,18.9 v2(38.575,18.9) ; v1@10.408,17.22 cw(c10.6,17.028) 10.6,17.3 cw(c10.6,17.572) v1@10.408,17.38 ; v2@38.476,18.82 ccw(c38.284,18.628) 38.284,18.9 ccw(c38.284,19.172) v2@38.476,18.98
NetP18_1: P18.1 R2.2 | length 6.4
  Top Layer w0.05: R2.2 33.675,16.275 34.7,16.275 35.725,15.25 38.125,15.25 38.575,15.7 P18.1
NetP19_1: P19.1 R3.2 | length 5.1
  Top Layer w0.05: R3.2 34.9,15.925 35.675,15.15 38.425,15.15 38.575,15.3 P19.1
NetP20_1: P20.1 R4.2 | length 5.1
  Top Layer w0.05: R4.2 34.9,14.275 35.675,15.05 38.425,15.05 38.575,14.9 P20.1
NetP21_1: P21.1 R5.2 | length 6.4
  Top Layer w0.05: R5.2 33.675,13.925 34.691,13.925 35.716,14.95 38.125,14.95 38.575,14.5 P21.1
REF_ELEC: P42.1 P43.1 R1.1 R2.1 R3.1 R4.1 R5.1 R6.1 XP1.17 XP2.17 | length 26.9
  Top Layer w0.075: v2(31.425,15.1) P42.1 P43.1 32.875,15.1 ; R6.1 32.975,15 32.875,15.1 ; R1.1 32.975,15.2 32.875,15.1 ; R5.1 33.675,15 33.575,15.1 ; R2.1 33.675,15.2 33.575,15.1 ; R4.1 34.375,15 34.275,15.1 ; R3.1 34.375,15.2 34.275,15.1 ; 32.875,15.1 33.575,15.1 ; 33.575,15.1 34.275,15.1
  Top Layer w0.1: R6.1@32.975,14.7 R6.1 ; R1.1 R1.1@32.975,15.5
  Mid-Layer 1 w0.05: v1(10.325,15.1) v2(31.425,15.1) ; v1@10.408,15.02 cw(c10.6,14.828) 10.6,15.1 cw(c10.6,15.372) v1@10.408,15.18

## Other copper
Top Layer:
  rectangle net 10: 11.175,10.875 11.287,11.075
  rectangle net 12: 11.175,11.425 11.287,11.625
  rectangle net 14: 11.175,11.975 11.287,12.175
  rectangle net 16: 11.175,12.525 11.287,12.725
  rectangle net 18: 11.175,13.075 11.287,13.275
  rectangle net 20: 11.175,13.625 11.287,13.825
  rectangle net 22: 11.175,14.175 11.287,14.375
  rectangle net 24: 11.175,14.725 11.287,14.925
  rectangle net 25: 11.175,15.275 11.287,15.475
  rectangle net 27: 11.175,15.825 11.287,16.025
  rectangle net 29: 11.175,16.375 11.287,16.575
  rectangle net 31: 11.175,16.925 11.287,17.125
  rectangle net 1: 11.175,17.475 11.287,17.675
  rectangle net 3: 11.175,18.025 11.287,18.225
  rectangle net 5: 11.175,18.575 11.287,18.775
  rectangle net 7: 11.162,19.125 11.275,19.325
Bottom Layer:
  rectangle net 10: 11.175,10.875 11.287,11.075
  rectangle net 12: 11.175,11.425 11.287,11.625
  rectangle net 14: 11.175,11.975 11.287,12.175
  rectangle net 16: 11.175,12.525 11.287,12.725
  rectangle net 18: 11.175,13.075 11.287,13.275
  rectangle net 20: 11.175,13.625 11.287,13.825
  rectangle net 22: 11.175,14.175 11.287,14.375
  rectangle net 24: 11.175,14.725 11.287,14.925
  rectangle net 25: 11.175,15.275 11.287,15.475
  rectangle net 27: 11.175,15.825 11.287,16.025
  rectangle net 29: 11.175,16.375 11.287,16.575
  rectangle net 31: 11.175,16.925 11.287,17.125
  rectangle net 1: 11.175,17.475 11.287,17.675
  rectangle net 3: 11.175,18.025 11.287,18.225
  rectangle net 5: 11.175,18.575 11.287,18.775
  rectangle net 7: 11.162,19.125 11.275,19.325

## Silkscreen, mask and mechanical layers (free items; w line width, h text height)
Mechanical 3:
  circle w0.025: c37.325,7.1 r0.3
  circle w0.025: c39.125,7.1 r0.3
  circle w0.025: c39.125,23.1 r0.3
  circle w0.025: c37.326,23.1 r0.3
  lines w0.025: 10.1,20 11.15,20.7 ; 10.113,20.012 ccw(c10.325,19.8) 10.025,19.8 10.025,19.325 11.175,19.325 cw(c11.175,19.275) 11.225,19.275 11.225,19.175 cw(c11.175,19.175) 11.175,19.125 10.025,19.125 10.025,18.775 11.175,18.775 cw(c11.175,18.725) 11.225,18.725 11.225,18.625 cw(c11.175,18.625) 11.175,18.575 10.025,18.575 10.025,18.225 11.175,18.225 cw(c11.175,18.175) 11.225,18.175 11.225,18.075 cw(c11.175,18.075) 11.175,18.025 10.025,18.025 10.025,17.675 11.175,17.675 cw(c11.175,17.625) 11.225,17.625 11.225,17.525 cw(c11.175,17.525) 11.175,17.475 10.025,17.475 10.025,17.125 11.175,17.125 cw(c11.175,17.075) 11.225,17.075 11.225,16.975 cw(c11.175,16.975) 11.175,16.925 10.025,16.925 10.025,16.575 11.175,16.575 cw(c11.175,16.525) 11.225,16.525 11.225,16.425 cw(c11.175,16.425) 11.175,16.375 10.025,16.375 10.025,16.025 11.175,16.025 cw(c11.175,15.975) 11.225,15.975 11.225,15.875 cw(c11.175,15.875) 11.175,15.825 10.025,15.825 10.025,15.475 11.175,15.475 cw(c11.175,15.425) 11.225,15.425 11.225,15.325 cw(c11.175,15.325) 11.175,15.275 10.025,15.275 10.025,14.925 11.175,14.925 cw(c11.175,14.875) 11.225,14.875 11.225,14.775 cw(c11.175,14.775) 11.175,14.725 10.025,14.725 10.025,14.375 11.175,14.375 cw(c11.175,14.325) 11.225,14.325 11.225,14.225 cw(c11.175,14.225) 11.175,14.175 10.025,14.175 10.025,13.825 11.175,13.825 cw(c11.175,13.775) 11.225,13.775 11.225,13.675 cw(c11.175,13.675) 11.175,13.625 10.025,13.625 10.025,13.275 11.175,13.275 cw(c11.175,13.225) 11.225,13.225 11.225,13.125 cw(c11.175,13.125) 11.175,13.075 10.025,13.075 10.025,12.725 11.175,12.725 cw(c11.175,12.675) 11.225,12.675 11.225,12.575 cw(c11.175,12.575) 11.175,12.525 10.025,12.525 10.025,12.175 11.175,12.175 cw(c11.175,12.125) 11.225,12.125 11.225,12.025 ; 11.149,20.701 ccw(c10.925,20.9) 11.225,20.9 cw(c12.125,20.9) 13.025,20.9 13.025,19.6 13.025,17.2 ccw(c13.225,17.2) 13.225,17 30.075,17 ccw(c30.075,17.1) 30.175,17.1 cw(c30.275,17.1) 30.275,17.2 35.825,17.2 ccw(c35.825,18.1) 36.725,18.1 ; 11.225,12.025 cw(c11.175,12.025) 11.175,11.975 10.025,11.975 10.025,11.625 11.175,11.625 cw(c11.175,11.575) 11.225,11.575 11.225,11.475 cw(c11.175,11.475) 11.175,11.425 10.025,11.425 10.025,11.075 11.175,11.075 cw(c11.175,11.025) 11.225,11.025 11.225,10.925 cw(c11.175,10.925) 11.175,10.875 10.025,10.875 10.025,10.4 12.825,10.4 ccw(c12.825,10.6) 13.025,10.6 13.025,13 cw(c13.225,13) 13.225,13.2 30.075,13.2 cw(c30.075,13.1) 30.175,13.1 ccw(c30.275,13.1) 30.275,13 35.825,13 cw(c35.825,12.1) 36.725,12.1 36.725,6.7 ; 36.724,6.7 ccw(c37.024,6.701) 37.025,6.4 39.425,6.4 ccw(c39.426,6.701) 39.726,6.7 ; 36.725,18.101 36.725,23.5 cw(c37.026,23.499) 37.026,23.8 39.425,23.8 cw(c39.426,23.499) 39.726,23.5 ; 39.725,6.7 39.725,23.5
Mechanical 6:
  lines w0.025: 10.1,20 11.15,20.7 ; 10.113,20.012 ccw(c10.325,19.8) 10.025,19.8 10.025,19.325 11.175,19.325 cw(c11.175,19.275) 11.225,19.275 11.225,19.175 cw(c11.175,19.175) 11.175,19.125 10.025,19.125 10.025,18.775 11.175,18.775 cw(c11.175,18.725) 11.225,18.725 11.225,18.625 cw(c11.175,18.625) 11.175,18.575 10.025,18.575 10.025,18.225 11.175,18.225 cw(c11.175,18.175) 11.225,18.175 11.225,18.075 cw(c11.175,18.075) 11.175,18.025 10.025,18.025 10.025,17.675 11.175,17.675 cw(c11.175,17.625) 11.225,17.625 11.225,17.525 cw(c11.175,17.525) 11.175,17.475 10.025,17.475 10.025,17.125 11.175,17.125 cw(c11.175,17.075) 11.225,17.075 11.225,16.975 cw(c11.175,16.975) 11.175,16.925 10.025,16.925 10.025,16.575 11.175,16.575 cw(c11.175,16.525) 11.225,16.525 11.225,16.425 cw(c11.175,16.425) 11.175,16.375 10.025,16.375 10.025,16.025 11.175,16.025 cw(c11.175,15.975) 11.225,15.975 11.225,15.875 cw(c11.175,15.875) 11.175,15.825 10.025,15.825 10.025,15.475 11.175,15.475 cw(c11.175,15.425) 11.225,15.425 11.225,15.325 cw(c11.175,15.325) 11.175,15.275 10.025,15.275 10.025,14.925 11.175,14.925 cw(c11.175,14.875) 11.225,14.875 11.225,14.775 cw(c11.175,14.775) 11.175,14.725 10.025,14.725 10.025,14.375 11.175,14.375 cw(c11.175,14.325) 11.225,14.325 11.225,14.225 cw(c11.175,14.225) 11.175,14.175 10.025,14.175 10.025,13.825 11.175,13.825 cw(c11.175,13.775) 11.225,13.775 11.225,13.675 cw(c11.175,13.675) 11.175,13.625 10.025,13.625 10.025,13.275 11.175,13.275 cw(c11.175,13.225) 11.225,13.225 11.225,13.125 cw(c11.175,13.125) 11.175,13.075 10.025,13.075 10.025,12.725 11.175,12.725 cw(c11.175,12.675) 11.225,12.675 11.225,12.575 cw(c11.175,12.575) 11.175,12.525 10.025,12.525 10.025,12.175 11.175,12.175 cw(c11.175,12.125) 11.225,12.125 11.225,12.025 ; 11.149,20.701 ccw(c10.925,20.9) 11.225,20.9 cw(c12.125,20.9) 13.025,20.9 13.025,19.6 13.025,10.6 cw(c12.825,10.6) 12.825,10.4 10.025,10.4 10.025,10.875 11.175,10.875 ccw(c11.175,10.925) 11.225,10.925 11.225,11.025 ccw(c11.175,11.025) 11.175,11.075 10.025,11.075 10.025,11.425 11.175,11.425 ccw(c11.175,11.475) 11.225,11.475 11.225,11.575 ccw(c11.175,11.575) 11.175,11.625 10.025,11.625 10.025,11.975 11.175,11.975 ccw(c11.175,12.025) 11.225,12.025 ; 30.075,13.2 cw(c30.075,13.1) 30.175,13.1 ccw(c30.275,13.1) 30.275,13 35.825,13 35.825,17.2 30.275,17.2 ccw(c30.275,17.1) 30.175,17.1 cw(c30.075,17.1) 30.075,17 30.075,13.2

## Dimensions
13.025,18.8 to 10.025,19.8 on Mechanical 1
11.225,19.325 to 10.025,19.325 on Mechanical 1
35.825,17.2 to 35.825,13 on Mechanical 1
13.225,17 to 13.225,13.2 on Mechanical 1
10.025,19.8 to 39.725,6.7 on Mechanical 1
11.225,19.125 to 39.725,6.7 on Mechanical 1
39.725,6.7 to 36.725,6.7 on Mechanical 1
37.026,23.8 to 37.025,6.4 on Mechanical 1
13.225,13.2 to 11.225,11.025 on Mechanical 1
12.125,21.8 to 10.025,19.8 on Mechanical 1